# Altium PCB PCB-neu_2025-06-24.pcbdoc
Units mil, origin at the board's own origin, x right, y up, seen from the top; angles counter-clockwise.
Board outline 3514.31 x 3372.2 mil, 2 copper layers (Top Layer, Bottom Layer); 8 components, 27 nets, 80 pads, 11 vias.
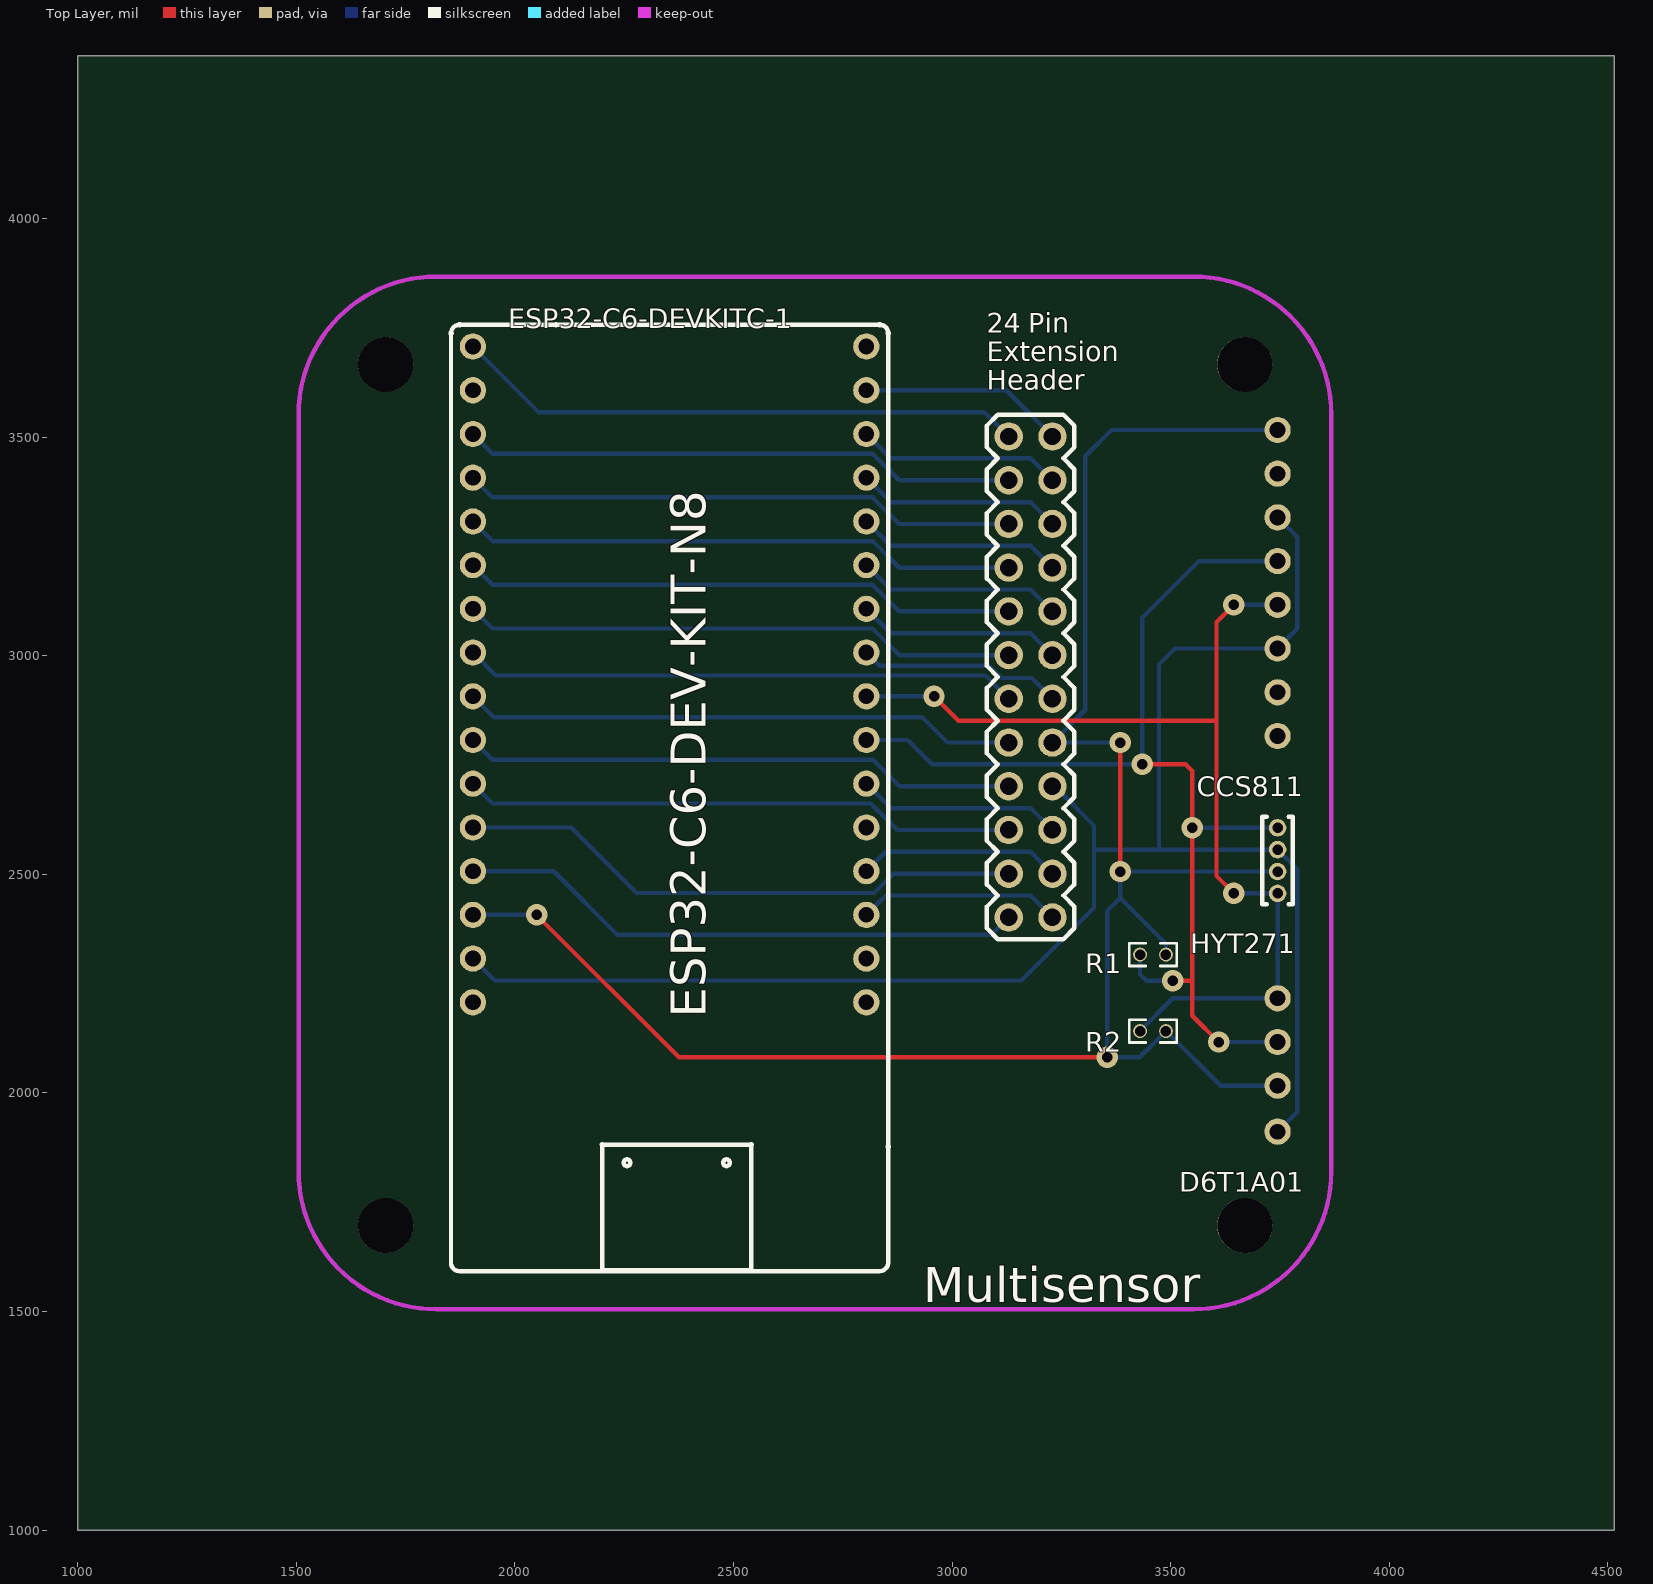
[diagram p0: Top Layer view]
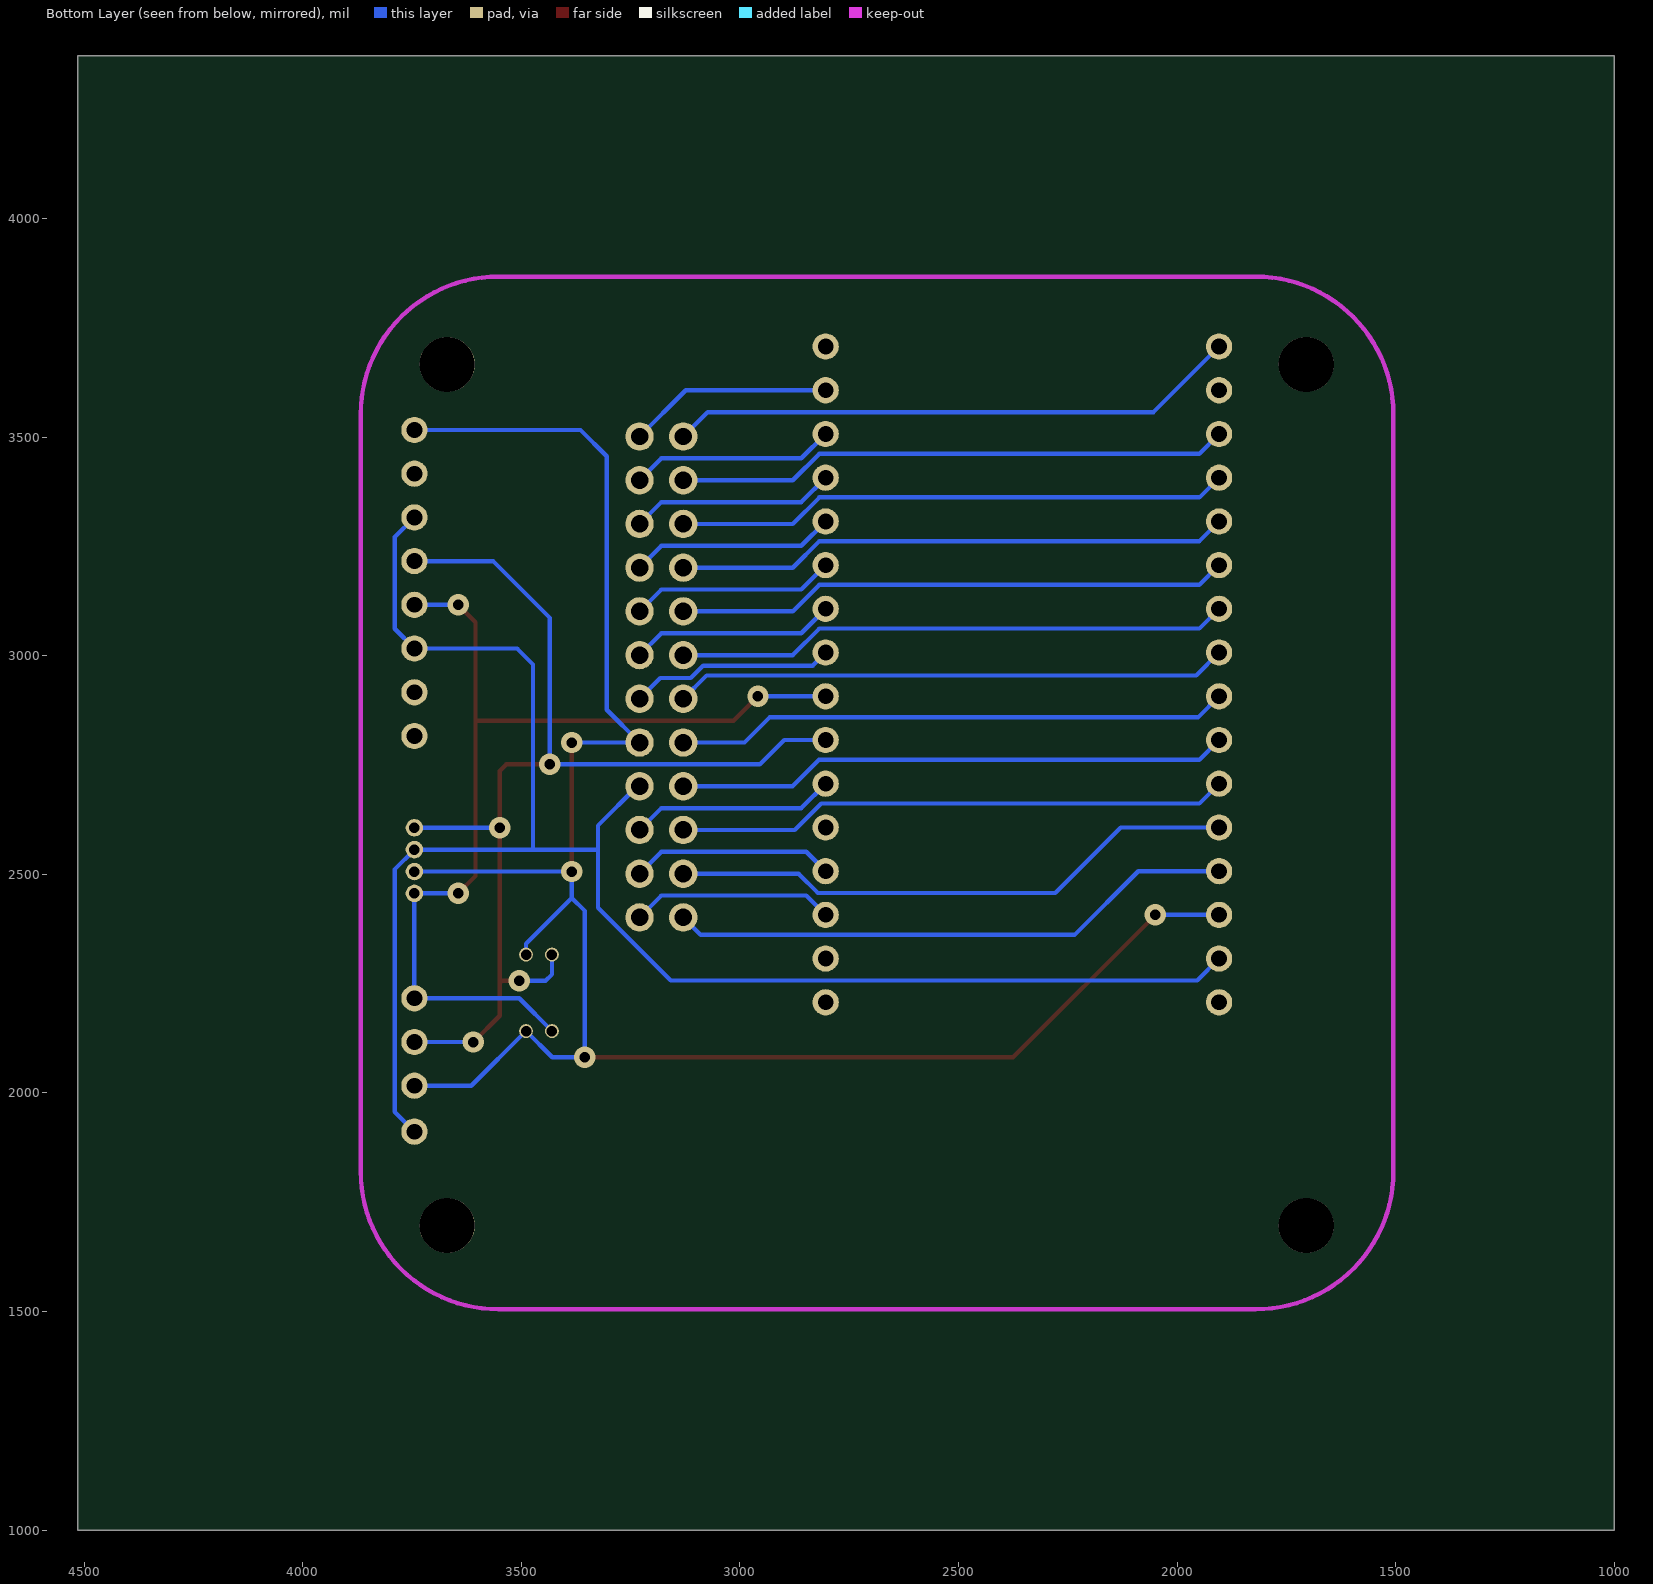
[diagram p1: Bottom Layer view, seen from below]

## Layer stack, top to bottom
Top Layer: signal copper (thickness not stored)
Dielectric: dielectric 12.6, FR-4, Dk 4.8
Bottom Layer: signal copper (thickness not stored)

## Board outline
4514.31,1000 1000,1000 1000,4372.2 4514.31,4372.2

## Components (designator, comment, footprint, x,y, rotation, side; value= is the part's Value field where it differs from the comment)
24 "2X12 PIN HEADER MALE" "PIN-HEADER-210S-2X12P WK" 3229.41,3351.38 r270 top
CCS811 "CCS811 Joy-It" "CCS811 JOY-IT" 3744.41,3516.38 r0 top
D6T1A01 "D6T1A01" D6T1A01 3744.41,2216.38 r0 top
ESP32-C6-DEVKITC-1 "ESP32-C6-DEV-KIT" ESP32-C6-DEV-KIT-N8 1899.45,3706.33 r0 top
HYT271 "HYT271" HYT271 3744.41,2606.38 r270 top
R1 "4,7k" R0603 3459.41,2316.38 r0 top
R2 "4,7k" R0603 3459.41,2141.38 r0 top
? "" ? 3878.36,2531.38 r0 top

## Footprints (in the part's own frame and the unit in brackets; to place one, negate y for a bottom-side part, rotate by r counter-clockwise, add the part's x,y. Pads: shape width x height; smd on the part's side, far side on the other; paste and mask are expansions set on the pad)
"CCS811 JOY-IT" [mil]
  round 60 hole 36 paste+0 mask+2: 1(0,0) 2(0,-100) 3(0,-200) 4(0,-300) 5(0,-400) 6(0,-500) 7(0,-600) 8(0,-700)
D6T1A01 [mil]
  round 60 hole 36 paste+0 mask+2: 1(0,0) 2(0,-100) 3(0,-200) 4(0,-305)
ESP32-C6-DEV-KIT-N8 [mil]
  round 60 hole 36 paste+0 mask+2: 1(4.26,0.85) 2(4.26,-99.15) 3(4.26,-199.15) 4(4.26,-299.15) 5(4.26,-399.15) 6(4.26,-499.15) 7(4.26,-599.15) 8(4.26,-699.15) 9(4.26,-799.15) 10(4.26,-899.15) 11(4.26,-999.15) 12(4.26,-1099.15) 13(4.26,-1199.15) 14(4.26,-1299.15) 15(4.26,-1399.15) 16(4.26,-1499.15) 17(904.26,-1499.15) 18(904.26,-1399.15) 19(904.26,-1299.15) 20(904.26,-1199.15) 21(904.26,-1099.15) 22(904.26,-999.15) 23(904.26,-899.15) 24(904.26,-799.15) 25(904.26,-699.15) 26(904.26,-599.15) 27(904.26,-499.15) 28(904.26,-399.15) 29(904.26,-299.15) 30(904.26,-199.15) 31(904.26,-99.15) 32(904.26,0.85)
  silkscreen extent -47,-2114 956,52
HYT271 [mil]
  silkscreen extent -25,-35 175,35
"PIN-HEADER-210S-2X12P WK" [mil]
  round 65 hole 40 paste+0 mask+4: 1(-150,0) 2(-50,0) 3(50,0) 4(150,0) 5(250,0) 6(350,0) 7(450,0) 8(550,0) 9(650,0) 10(750,0) 11(850,0) 12(950,0) 13(-150,-100) 14(-50,-100) 15(50,-100) 16(150,-100) 17(250,-100) 18(350,-100) 19(450,-100) 20(550,-100) 21(650,-100) 22(750,-100) 23(850,-100) 24(950,-100)
  silkscreen extent -200,-150 1000,50
R0603 [mm]
  round 0.806 hole 0.61 paste-100 mask+0.051: 1(-0.753,0) 2(0.753,0)
  silkscreen extent -1.39,-0.66 1.39,0.66
? [mil]

## Free pads (board coordinates)
  round 40 hole 24.02 paste+0 mask+2: 1(3744.41,2606.38) 2(3744.41,2556.38) 3(3744.41,2506.38) 4(3744.41,2456.38)
  round 125.98 hole 125.98 unplated paste+0: ""(1704.41,1696.38) ""(1704.41,3666.38) ""(3669.41,1696.38) ""(3669.41,3666.38)

## Via types
v1: diameter 48.82, hole 24.02, Top Layer to Bottom Layer, tented both sides, 11 vias

## Nets (pads, with @x,y where several pads share a name; then routed paths per layer and width w, separated by ;. In a path a pad name is that pad's centre, name@x,y a point inside that pad or via, vN(x,y) a via of type N, cw(c..) or ccw(c..) an arc to the next point about the centre after c; other vN are vias at no path point)
3V3: 24.13 ESP32-C6-DEVKITC-1.1 | length 1310.9
  Bottom Layer w10: ESP32-C6-DEVKITC-1.1 2053.71,3557.18 3073.61,3557.18 24.13
5V0: 24.8 CCS811.1 D6T1A01.3 ESP32-C6-DEVKITC-1.14 pad.3 R1.2 R2.2 | length 4603.7
  Top Layer w10: v1(2049.41,2407.18) 2375.21,2081.38 v1(3354.41,2081.38) ; v1(3384.41,2506.38) v1(3384.41,2801.38)
  Bottom Layer w10: ESP32-C6-DEVKITC-1.14 v1(2049.41,2407.18) ; v1@3364.41,2801.38 24.8 3304.41,2876.38 3304.41,3456.38 3364.41,3516.38 CCS811.1 ; 3384.41,2446.04 v1(3384.41,2506.38) pad.3 ; R1.2 3489.11,2341.38 3384.41,2446.08 3354.41,2416.08 3354.41,2257.08 v1(3354.41,2081.38) 3429.07,2081.38 R2.2 3614.07,2016.38 D6T1A01.3
GND: 24.9 CCS811.3 CCS811.6 D6T1A01.4 ESP32-C6-DEVKITC-1.15 pad.2 | length 3980.4
  Bottom Layer w10: ESP32-C6-DEVKITC-1.15 1953.71,2257.18 3158.21,2257.18 3324.41,2423.38 3324.41,2611.38 3234.41,2701.38 24.9 ; 3324.41,2556.38 pad.2 3789.73,2511.06 3789.73,1956.7 D6T1A01.4 ; 3473.01,2556.38 3473.01,2979.98 3509.41,3016.38 CCS811.6 3789.41,3061.38 3789.41,3271.38 CCS811.3
GPIO0: 24.18 ESP32-C6-DEVKITC-1.7 | length 1269.5
  Bottom Layer w10: ESP32-C6-DEVKITC-1.7 1948.79,3062.1 2817.99,3062.1 2878.71,3001.38 24.18
GPIO1: 24.19 ESP32-C6-DEVKITC-1.8 | length 1269.5
  Bottom Layer w10: ESP32-C6-DEVKITC-1.8 1956.19,2954.7 3076.09,2954.7 24.19
GPIO2: 24.23 ESP32-C6-DEVKITC-1.12 | length 1306.1
  Bottom Layer w10: ESP32-C6-DEVKITC-1.12 2128.61,2607.18 2278.61,2457.18 2821.41,2457.18 2865.61,2501.38 24.23
GPIO3: 24.24 ESP32-C6-DEVKITC-1.13 | length 1302.7
  Bottom Layer w10: ESP32-C6-DEVKITC-1.13 2088.61,2507.18 2234.41,2361.38 3089.41,2361.38 24.24
GPIO4: 24.14 ESP32-C6-DEVKITC-1.3 | length 1269.5
  Bottom Layer w10: ESP32-C6-DEVKITC-1.3 1948.79,3462.1 2817.99,3462.1 2878.71,3401.38 24.14
GPIO5: 24.15 ESP32-C6-DEVKITC-1.4 | length 1269.5
  Bottom Layer w10: ESP32-C6-DEVKITC-1.4 1948.79,3362.1 2817.99,3362.1 2878.71,3301.38 24.15
GPIO6: 24.16 ESP32-C6-DEVKITC-1.5 | length 1269.5
  Bottom Layer w10: ESP32-C6-DEVKITC-1.5 1948.79,3262.1 2817.99,3262.1 2878.71,3201.38 24.16
GPIO7: 24.17 ESP32-C6-DEVKITC-1.6 | length 1269.5
  Bottom Layer w10: ESP32-C6-DEVKITC-1.6 1948.79,3162.1 2817.99,3162.1 2878.71,3101.38 24.17
GPIO8: 24.20 ESP32-C6-DEVKITC-1.9 | length 1269.5
  Bottom Layer w10: ESP32-C6-DEVKITC-1.9 1952.01,2858.88 2931.91,2858.88 2989.41,2801.38 24.20
GPIO9: 24.10 ESP32-C6-DEVKITC-1.22 | length 469.5
  Bottom Layer w10: ESP32-C6-DEVKITC-1.22 2859.51,2651.38 3179.41,2651.38 24.10
GPIO10: 24.21 ESP32-C6-DEVKITC-1.10 | length 1269.5
  Bottom Layer w10: ESP32-C6-DEVKITC-1.10 1948.79,2762.1 2818.87,2762.1 2879.59,2701.38 24.21
GPIO11: 24.22 ESP32-C6-DEVKITC-1.11 | length 1269.5
  Bottom Layer w10: ESP32-C6-DEVKITC-1.11 1948.81,2662.08 2813.71,2662.08 2874.41,2601.38 24.22
GPIO12: 24.12 ESP32-C6-DEVKITC-1.19 | length 464.7
  Bottom Layer w10: ESP32-C6-DEVKITC-1.19 2847.91,2451.38 3179.41,2451.38 24.12
GPIO13: 24.11 ESP32-C6-DEVKITC-1.20 | length 464.7
  Bottom Layer w10: ESP32-C6-DEVKITC-1.20 2847.91,2551.38 3179.41,2551.38 24.11
GPIO15: 24.3 ESP32-C6-DEVKITC-1.29 | length 469.5
  Bottom Layer w10: ESP32-C6-DEVKITC-1.29 2859.51,3351.38 3179.41,3351.38 24.3
GPIO16: 24.1 ESP32-C6-DEVKITC-1.31 | length 469.5
  Bottom Layer w10: ESP32-C6-DEVKITC-1.31 3123.61,3607.18 24.1
GPIO17: 24.2 ESP32-C6-DEVKITC-1.30 | length 469.5
  Bottom Layer w10: ESP32-C6-DEVKITC-1.30 2859.51,3451.38 3179.41,3451.38 24.2
GPIO20: 24.7 ESP32-C6-DEVKITC-1.25 | length 469.5
  Bottom Layer w10: ESP32-C6-DEVKITC-1.25 2833.63,2977.26 3084.09,2977.26 3112.39,2948.96 3181.83,2948.96 24.7
GPIO21: 24.6 ESP32-C6-DEVKITC-1.26 | length 469.5
  Bottom Layer w10: ESP32-C6-DEVKITC-1.26 2859.51,3051.38 3179.41,3051.38 24.6
GPIO22: 24.5 ESP32-C6-DEVKITC-1.27 | length 469.5
  Bottom Layer w10: ESP32-C6-DEVKITC-1.27 2859.51,3151.38 3179.41,3151.38 24.5
GPIO23: 24.4 ESP32-C6-DEVKITC-1.28 | length 469.5
  Bottom Layer w10: ESP32-C6-DEVKITC-1.28 2859.51,3251.38 3179.41,3251.38 24.4
S$9693: 
SCL: CCS811.5 D6T1A01.1 ESP32-C6-DEVKITC-1.24 pad.4 R2.1 | length 2302.7
  Top Layer w10: v1(2958.61,2907.18) 3014.41,2851.38 3604.61,2851.38 ; v1(3644.41,2456.38) 3604.61,2496.18 3604.61,2851.38 ; v1(3644.41,3116.38) 3604.61,3076.58 3604.61,2851.38
  Bottom Layer w10: ESP32-C6-DEVKITC-1.24 v1(2958.61,2907.18) ; R2.1 3504.75,2216.38 D6T1A01.1 pad.4 v1(3644.41,2456.38) ; v1(3644.41,3116.38) CCS811.5
SDA: CCS811.4 D6T1A01.2 ESP32-C6-DEVKITC-1.23 pad.1 R1.1 | length 2621.9
  Top Layer w10: v1(3434.41,2751.38) 3534.41,2751.38 3549.41,2736.38 v1(3549.41,2606.38) 3549.41,2176.38 v1(3609.41,2116.38) ; v1(3504.41,2256.38) 3544.41,2256.38 3549.41,2251.38
  Bottom Layer w10: ESP32-C6-DEVKITC-1.23 2843.91,2807.18 2878.61,2807.18 2898.61,2807.18 2954.41,2751.38 v1(3434.41,2751.38) 3434.41,3086.38 3564.41,3216.38 CCS811.4 ; R1.1 3429.71,2271.08 3444.41,2256.38 v1(3504.41,2256.38) ; v1(3549.41,2606.38) pad.1 ; v1(3609.41,2116.38) D6T1A01.2
pads on no net: CCS811.2 CCS811.7 CCS811.8 ESP32-C6-DEVKITC-1.2 ESP32-C6-DEVKITC-1.16 ESP32-C6-DEVKITC-1.17 ESP32-C6-DEVKITC-1.18 ESP32-C6-DEVKITC-1.21 ESP32-C6-DEVKITC-1.32

## Keep-outs
Keep-Out Layer:
  lines w10: 1505,1819.96 ccw(c1819.96,1819.96) 1819.96,1505 ; 1505,3552.24 cw(c1819.96,3552.24) 1819.96,3867.2 ; 3552.24,1505 ccw(c3552.24,1819.96) 3867.2,1819.96 ; 3552.24,3867.2 cw(c3552.24,3552.24) 3867.2,3552.24

## Silkscreen, mask and mechanical layers (free items; w line width, h text height)
Top Overlay:
  text "Pin" at 3174.41,3738.88 h45
  text "Extension" at 3079.41,3673.88 h45
  text "Header" at 3079.41,3608.88 h45
  text "Multisensor" at 2934.41,1521.38 h80
Document:
  lines w10 net S$9693: 3644.41,3211.38 3644.41,2911.38 3789.41,2766.38

## Text inside footprints (layer, text, board x,y; h text height)
ESP32-C6-DEVKITC-1: Top Overlay "ESP32-C6-DEV-KIT-N8" at 2436.57,2171.47 h80 r90